# Altium PCB dongle.PcbDoc
Units mil, origin at the board's own origin, x right, y up, seen from the top; angles counter-clockwise.
Board outline 1358.54 x 591.71 mil, 2 copper layers (Top Layer, Bottom Layer); 24 components, 19 nets, 131 pads, 17 vias.
Unrouted connection lines stored in the file: 2.
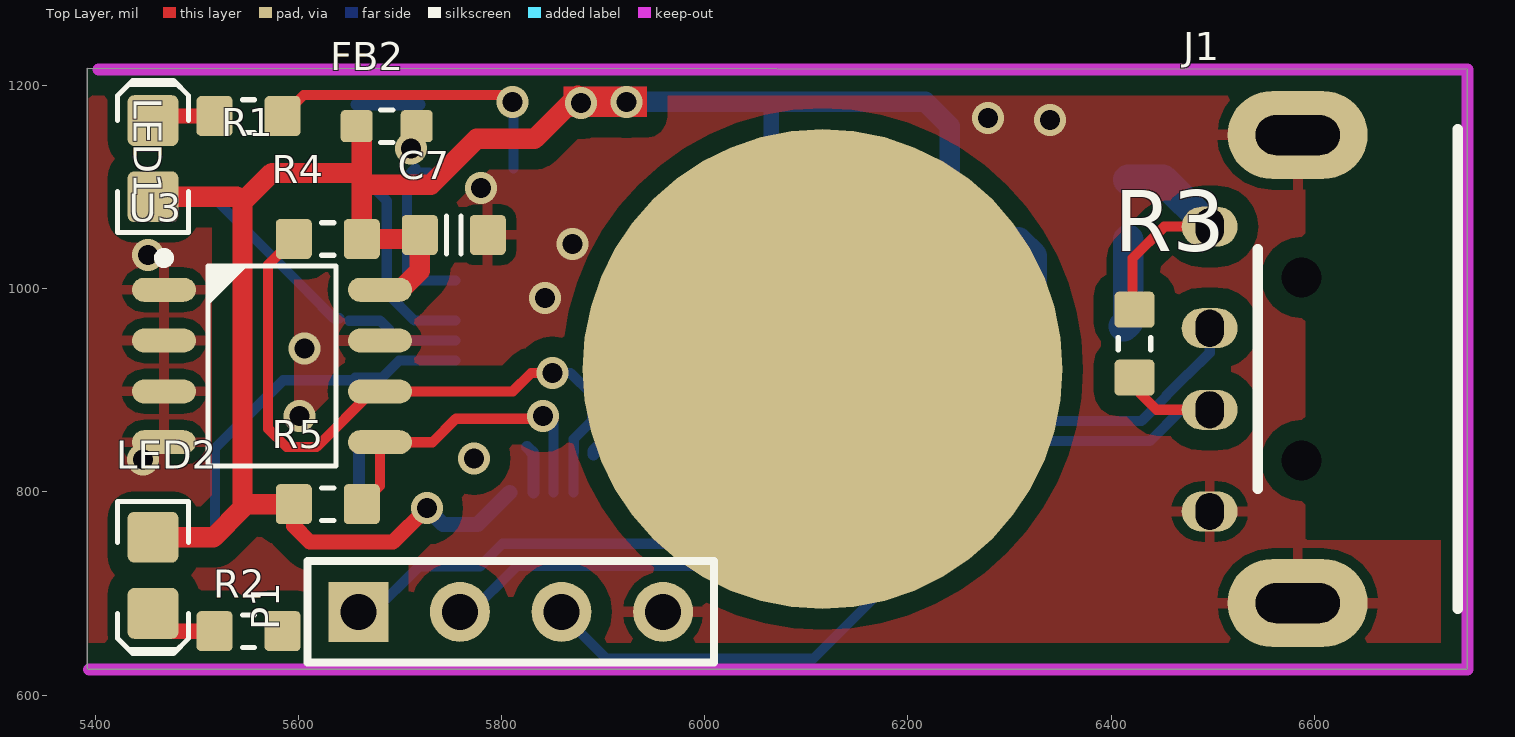
[diagram p0: Top Layer view]
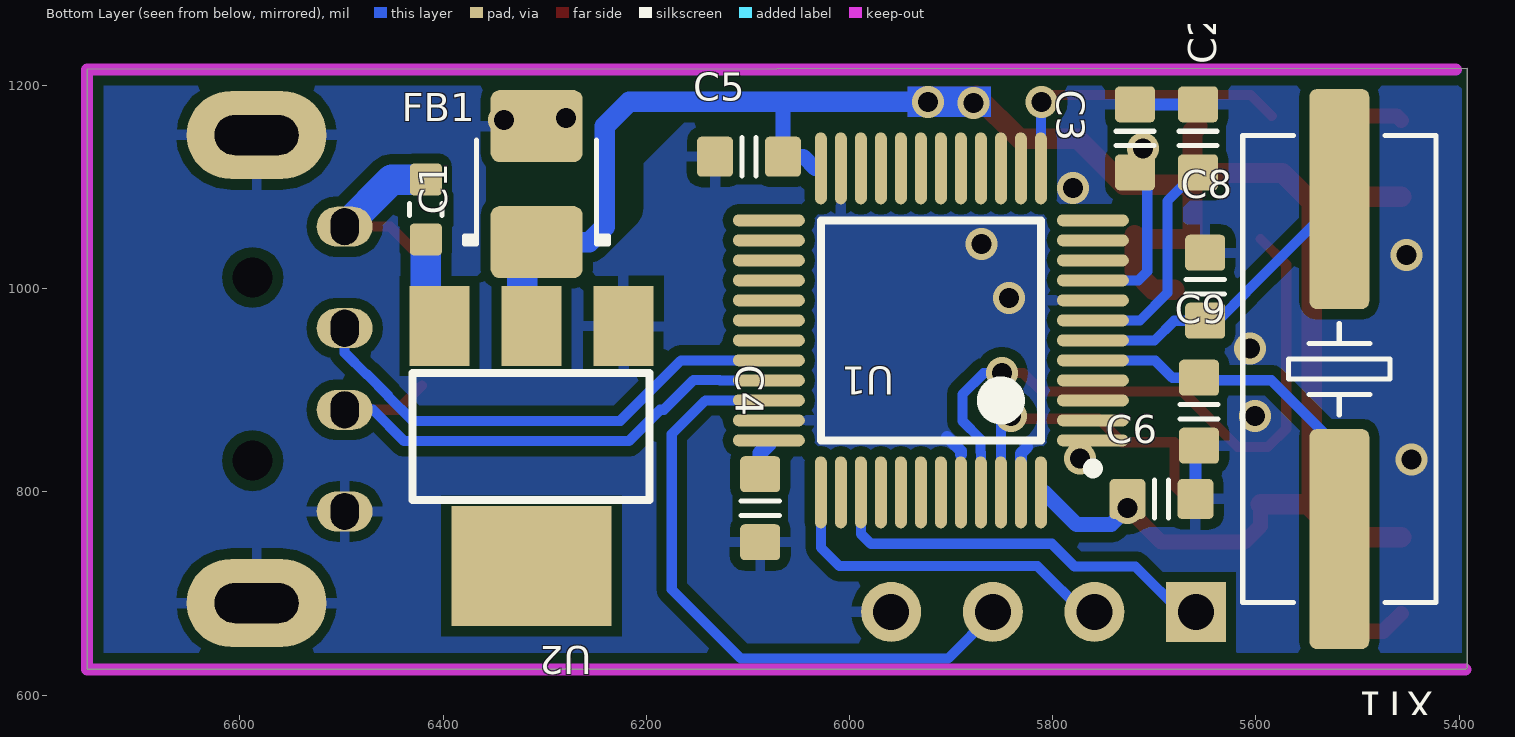
[diagram p1: Bottom Layer view, seen from below]

## Layer stack, top to bottom
Top Solder: solder mask 0.4, Solder Resist, Dk 3.5
Top Layer: signal copper 1.4
Dielectric 1: dielectric 12.6, FR-4, Dk 4.8
Bottom Layer: signal copper 1.4
Bottom Solder: solder mask 0.4, Solder Resist, Dk 3.5

## Board outline
6750.54,1216 6750.54,625.29 5393.7,625.29 5392,626.99 5392,1217

## Design rules (kind name [scope] priority, off if disabled: settings)
Clearance Clearance_2 [InNamedPolygon('roo')] p1: gap=20
Clearance Clearance_1 [InComponent('U1') vs InComponent('U1')] p2: gap=7
Clearance [All] p3: gap=10
DiffPairsRouting [All] p1: maxlimit=10 minlimit=10 mostfreqgap=10 toplayer_minwidth=10 toplayer_maxwidth=15 toplayer_prefwidth=10 bottomlayer_minwidth=10 bottomlayer_maxwidth=15 bottomlayer_prefwidth=10 maxuncoupledlength=500
PolygonConnect PolygonConnect_1 [All vs isVia] p1: connectstyle=Direct reliefconductorwidth=10 reliefentries=4 polygonreliefangle="90 Angle" airgapwidth=10
PolygonConnect [All] p2: connectstyle=Relief reliefconductorwidth=10 reliefentries=4 polygonreliefangle="90 Angle" airgapwidth=10
RoutingVias [All] p1: holewidth=28 width=50 viastyle="Through Hole" minholewidth=3.94 minwidth=3.94 maxholewidth=393.7 maxwidth=393.7
SolderMaskExpansion [All] p1: expansion=4
Width [All] p1: maxlimit=393.7 minlimit=10 preferedwidth=10 minimp=50.000000 maximp=50.000000 favimp=50.000000
28 further rules are at their usual default settings.

## Classes and differential pairs
differential pair USB: +USB_P -USB_N

## Components (designator, comment, footprint, x,y, rotation, side; value= is the part's Value field where it differs from the comment)
C1 "2.2u Tan" CAPMP3528X210N 6308,1103 r90 bottom
C2 "approved sub OK" CAPC1608X90N 5657,1148 r90 bottom
C3 "approved sub OK" CAPC1608X90N 5719,1148 r90 bottom
C4 "approved sub OK" CAPC1608X90N 6088,784 r270 bottom
C5 "approved sub OK" CAPC1608X90N 6099,1130 r0 bottom
C6 "approved sub OK" CAPC1608X90N 5693,793 r180 bottom
C7 "approved sub OK" CAPC1608X90N 5753,1053 r0 top
C8 "22p" CAPC1608X90N 5650,1002 r270 bottom
C9 "22p" CAPC1608X90N 5656,879 r90 bottom
FB1 "2K2 @ 100 MHz" FBC1608X95N 6417,1078 r270 bottom
FB2 "2K2 @ 100 MHz" FBC1608X95N 5687,1160 r0 top
J1 "USB" USB_A_PLUG 6497,921 r0 top
LED1 "Green" LED-0805-K 5457,1128 r90 top
LED2 "Green" LED-0805-K 5457,718 r270 top
P1 "Header 4" HDR1X4 5659,682 r0 top
R1 "Thick Film" RESC1608X55N 5551,1170 r0 top
R2 "Thick Film" RESC1608X55N 5551,663 r0 top
R3 "Thick Film" RESC1608X55N 6423,946 r270 top
R4 "10K" RESC1608X55N 5629,1049 r0 top
R5 "10K" RESC1608X55N 5629,788 r180 top
U1 "STM32F103CBT6" STM-LQFP48_N 5920,959 r0 bottom
U2 "AMS1117" "AMS1117 3.3" 6313,727 r0 bottom
U3 "at24c512" SOIC127P600X175-8AN 5574,924 r0 top
XT1 "12MHz" CRYSTAL_HC49-US-SM 5518,921 r270 bottom

## Footprints (in the part's own frame and the unit in brackets; to place one, negate y for a bottom-side part, rotate by r counter-clockwise, add the part's x,y. Pads: shape width x height; smd on the part's side, far side on the other; paste and mask are expansions set on the pad)
"AMS1117 3.3" [mm]
  rect 1.5x2 smd: 1(-2.3,-6) 2(0,-6) 3(2.3,-6)
  rect 4x3 smd: 2(0,0)
  silkscreen extent -2.95,-4.82 2.98,-1.65, body extent -3.28,-6.68 3.22,0.32, height 1.85
CAPC1608X90N [mm] "Chip Capacitor, Body 1.6x0.8mm, EIA 0603, IPC Medium Density"
  round 0.254 on Mech15: 0(0,0)
  rrect25% 0.9x1 smd: 1(-0.85,0) 2(0.85,0)
  Top Layer pour cut-out: -0.6,0.5 -0.4,0.7 0.4,0.7 0.6,0.5 0.6,-0.5 0.4,-0.7 -0.4,-0.7 -0.6,-0.5
  silkscreen extent -0.18,-0.48 0.18,0.48, body extent -0.85,-0.45 0.85,0.45, height 0.89
CAPMP3528X210N [mm] "Molded body capacitor, Body 3.5x2.8mm, 1210, IPC Nominal settings"
  round 0.254 on Mech15: 0(0,0)
  rrect25% 1.8x2.3 smd: 1(-1.45,0) 2(1.45,0)
  Top Layer pour cut-out: -0.508,1.27 0.508,1.27 0.508,-1.27 -0.508,-1.27
  silkscreen extent -1.5,-1.8 1.1,1.8, body extent -1.75,-1.4 1.75,1.4, height 2.1
CRYSTAL_HC49-US-SM [mm] "SMD Crystal HC49/US-SM package"
  round 0.508 on Mech15: 0(0,0)
  rrect25% 5.5x1.5 smd: 1(-4.25,0) 2(4.25,0)
  silkscreen extent -5.84,-2.41 5.84,2.41, body extent -6.4,-2.41 6.4,2.42, height 4.29
FBC1608X95N [mm] "Chip Ferrite, Body 1.6x0.8mm, 0603, IPC Medium Density"
  round 0.254 on Mech15: 0(0,0)
  rrect25% 0.8x0.8 smd: 1(-0.75,0) 2(0.75,0)
  Top Layer pour cut-out: -0.6,0.5 -0.4,0.7 0.4,0.7 0.6,0.5 0.6,-0.5 0.4,-0.7 -0.4,-0.7 -0.6,-0.5
  silkscreen extent -0.15,-0.41 0.15,0.41, body extent -0.87,-0.47 0.88,0.48, height 0.95
HDR1X4 [mm] "Connector; Header; 4 Position"
  rect 1.5x1.5 hole 0.9: 1(0,0)
  round 1.5 hole 0.9: 2(2.54,0) 3(5.08,0) 4(7.62,0)
  silkscreen extent -1.27,-1.27 8.89,1.27
LED-0805-K [mil]
  round 20 on Mech15: 0(0,0)
  rrect25% 50x50 smd: A(-37.5,0) K(37.5,0)
  Top Layer pour cut-out: -15,30 15,30 15,-30 -15,-30
  silkscreen extent -72,-35 77,35, body extent -39,-25 39,25, height 31
RESC1608X55N [mm] "Chip Resistor, Body 1.6x0.8mm, EIA 0603, IPC Medium Density"
  round 0.254 on Mech15: 0(0,0)
  rrect25% 0.9x1 smd: 1(-0.85,0) 2(0.85,0)
  Top Layer pour cut-out: -0.6,0.5 -0.4,0.7 0.4,0.7 0.6,0.5 0.6,-0.5 0.4,-0.7 -0.4,-0.7 -0.6,-0.5
  silkscreen extent -0.15,-0.41 0.15,0.41, body extent -0.87,-0.47 0.88,0.48, height 0.54
SOIC127P600X175-8AN [mm] "SOIC, 8-Leads, Body 4.9x3.9mm, Pitch 1.27mm, IPC Medium Density"
  round 1 on Mech15: 0(0,0)
  oval 1.6x0.6 smd: 1(-2.7,1.905) 2(-2.7,0.635) 3(-2.7,-0.635) 4(-2.7,-1.905) 5(2.7,-1.905) 6(2.7,-0.635) 7(2.7,0.635) 8(2.7,1.905)
  silkscreen extent -2.82,-2.5 1.6,2.82, body extent -3,-2.45 3,2.45, height 1.75
STM-LQFP48_N [mm] "QFP, 48-Leads, Body 7x7mm, Pitch 0.5mm, IPC Medium Density"
  oval 1.8x0.3 smd: 1(-4.05,2.75) 2(-4.05,2.25) 3(-4.05,1.75) 4(-4.05,1.25) 5(-4.05,0.75) 6(-4.05,0.25) 7(-4.05,-0.25) 8(-4.05,-0.75) 9(-4.05,-1.25) 10(-4.05,-1.75) 11(-4.05,-2.25) 12(-4.05,-2.75) 25(4.05,-2.75) 26(4.05,-2.25) 27(4.05,-1.75) 28(4.05,-1.25) 29(4.05,-0.75) 30(4.05,-0.25) 31(4.05,0.25) 32(4.05,0.75) 33(4.05,1.25) 34(4.05,1.75) 35(4.05,2.25) 36(4.05,2.75)
  oval 0.3x1.8 smd: 13(-2.75,-4.05) 14(-2.25,-4.05) 15(-1.75,-4.05) 16(-1.25,-4.05) 17(-0.75,-4.05) 18(-0.25,-4.05) 19(0.25,-4.05) 20(0.75,-4.05) 21(1.25,-4.05) 22(1.75,-4.05) 23(2.25,-4.05) 24(2.75,-4.05) 37(2.75,4.05) 38(2.25,4.05) 39(1.75,4.05) 40(1.25,4.05) 41(0.75,4.05) 42(0.25,4.05) 43(-0.25,4.05) 44(-0.75,4.05) 45(-1.25,4.05) 46(-1.75,4.05) 47(-2.25,4.05) 48(-2.75,4.05)
  silkscreen extent -4.17,-2.75 2.75,3.57, body extent -3.5,-3.5 3.5,3.5, height 1.6
USB_A_PLUG [mm]
  round 0 hole 1: 0(2.3,-2.29) 0(2.3,2.29)
  oval 1.4x1 hole 0.7 slot 0.92 at 90 deg: 1(0,3.56) 2(0,1.02) 3(0,-1.02) 4(0,-3.56)
  oval 3.5x2.2 hole 1 slot 2.1 at 0 deg: 5(2.2,5.85) 6(2.2,-5.85)
  silkscreen extent 1.2,-6 6.2,6

## Part data
C1: library part CAPT_47u_1210_6V3, "Capacitor SMD Tantalum 47uF 20% 6.3V 1210"
C2 C3 C4 C5 C6 C7: library part CAPC_1n_0603_X7R_100V_10%, "Capacitor SMD Cer 1nF 10% 100V X7R 0603"
C8 C9: library part CAPC_18p_0603_100V, "Capacitor SMD Cer 18pF 2% 100V NP0 0603"
FB1 FB2: library part FERRITE_2K2-100MHz_0603, "Ferrite bead 2.2K Ohm at 100 MHz 200mA 0603 SMD"
LED1 LED2: library part LED_SMD_Green_0805_6mcd, "LED, 0805 SMD, Green"
P1: "Header, 4-Pin"
R1 R2 R3: library part RES_1K5_0603_5%, "Resistor SMD chip 1.5k Ohm 0.1W 5% 0603"
R4 R5: library part RES_2K2_0603_5%, "Resistor 0603"
U1: "ARM Cortex-M3 32-bit MCU, 128 KB Flash, 20 KB Internal RAM, 37 I/Os, 48-pin LQFP, -40 to 85 degC, Tray"
U3: library part AT24C01BN-SP25-B
XT1: library part Crystal_6MHz_HC49/US, "Resonator Ceramic 6.00 MHz 30ppm"

## Free pads (board coordinates)
  round 472.44 smd: 1(6116,921)

## Via types
v1: diameter 31.5, hole 19.68, Top Layer to Bottom Layer, 17 vias

## Nets (pads, with @x,y where several pads share a name; then routed paths per layer and width w, separated by ;. In a path a pad name is that pad's centre, name@x,y a point inside that pad or via, vN(x,y) a via of type N, cw(c..) or ccw(c..) an arc to the next point about the centre after c; other vN are vias at no path point)
3.3V: C1.1 C4.1 C5.1 C6.1 C7.1 FB2.1 LED1.A LED2.A R4.2 R5.2 U1.24 U1.36 U1.48 U2.2 U3.8 | length 2160.8
  Top Layer w15: R5.2 5595.54,766.46 5611.19,750.81 5693.28,750.81 v1(5726.46,784)
  Top Layer w20: LED2.A 5516.5,755.5 5545,784 ; LED1.A 5539.5,1090.5 5545,1085 ; R5.2 5549,788 5545,784 ; FB2.1 5662.46,1155.01 5662.46,1109.01 5657.47,1114 5574,1114 5545,1085 ; U3.8 5701,999 5719.54,1017.54 C7.1 5715.54,1049 R4.2 5662.46,1102.25 5730.25,1102.25 5775.5,1147.5 5832.5,1147.5 v1@5875.09,1190.09 ; 5545,784 5545,1085
  Bottom Layer w15: v1(5726.46,784) 5742.46,768 5776.46,768 U1.48@5808.01,799.55 ; U1.24@6031.99,1118.45 6033.98,1118.45 6045.54,1130 C5.1 6065.54,1180.46 6062,1184 ; U1.36@6079.45,847.01 6088,838.46 C4.1
  Bottom Layer w20: v1(5923,1184) 6062,1184 6217,1184 6241,1160 6241,1061 6256.09,1045.91 C1.1
  Bottom Layer w30: C1.1 6322,1031.91 U2.2@6322,963.22
  other v1: 5878,1183
5V: FB1.1 J1.1 R3.1 | length 246.6
  Top Layer w10: R3.1@6421,971.46 6421,1030 6452.16,1061.16 J1.1
  Bottom Layer w30: FB1.1 6450.63,1107.53 J1.1
GND: C1.2 C2.2 C3.2 C4.2 C5.2 C6.2 C7.2 C8.1 C9.1 J1.4 J1.5 J1.6 P1.4 U1.8 U1.23 U1.35 U1.44 U1.47 U2.1 U3.1 U3.2 U3.3 U3.4 U3.7 | length 186
  Bottom Layer w11.81: C9.1 5659.54,842 C6.2 ; C2.2 C3.2 ; 5825.21,844.06 5831.42,837.86 U1.47 ; 5890.47,836.73 5890.47,840.47 5904,854
  other v1: 5447,832 5601,875 5606,941 5843,991 5452,1033 5870,1044 5780,1099 6340,1166 6279,1168
LED1: R1.2 U1.13 | length 303.8
  Top Layer w10: R1.2 5605.21,1190.75 5804.25,1190.75 v1(5811,1184)
  Bottom Layer w10: v1(5811,1184) 5811,1173 5811.73,1172.27 U1.13
LED2: R2.2
NetC3_1: C3.1 FB2.2 U1.9 | length 165.6
  Bottom Layer w10: C3.1@5715,1118.54 5707,1110.54 5707,1017 5715.79,1008.21 U1.9@5754.55,1008.21 ; C3.1 C3.1@5728.54,1114.54
  other v1: 5711,1138
NetFB1_2: FB1.2 U2.3 | length 87.1
  Bottom Layer w30: U2.3@6412.55,963.22 6417,967.67 FB1.2
NetLED1_K: LED1.K R1.1 | length 62.4
  Top Layer w15: LED1.K 5461.5,1170 R1.1
NetLED2_K: LED2.K R2.1 | length 67.8
  Top Layer w15: LED2.K 5474.5,663 R2.1
OSC_IN: C9.2 U1.5 XT1.2 | length 361.6
  Bottom Layer w10: XT1.2 5518,843 5585,910 5653.54,910 C9.2 5682.31,912.46 5699,929.16 ; 5699,929.47 U1.5@5754.55,929.47
OSC_OUT: C8.2 U1.6 XT1.1 | length 283.8
  Bottom Layer w10: XT1.1 5610,996.32 5610,996 5635,971 C8.2@5640.46,971 ; C8.2 5680.46,968.54 5699.84,949.16 U1.6@5754.55,949.16
SCL: R4.1 U1.45 U3.6 | length 666.2
  Top Layer w10: R4.1 5570.25,1023.72 5570.25,862.26 5588.26,844.25 5617.95,844.25 5672.7,899 U3.6 5811,899 5829,917 v1(5850,917)
  Bottom Layer w10: v1(5850,917) 5868,917 5889,896 5889,870 5871.1,852.1 5871.1,839.27 5870.79,838.96 U1.45
SDA: R5.1 U1.46 U3.5 | length 321.1
  Top Layer w10: R5.1 5680.3,805.83 U3.5 5732,849 5755,872 v1@5851,872
  Bottom Layer w10: v1@5851,872 5851.1,871.9 U1.46
  other v1: 5841,875
STMRST: C2.1 U1.7 | length 211.8
  Bottom Layer w10: C2.1@5657,1116.54 5687,1086.54 5687,996 5714.16,968.84 U1.7@5754.55,968.84
SWCLK: P1.2 U1.37 | length 350.6
  Bottom Layer w10: P1.2@5759,680 5768,680 5815,727 6010,727 6028.27,745.27 U1.37
SWIO: P1.3 U1.34 | length 630.7
  Bottom Layer w10: P1.3@5859,680 5903,636 6107,636 6175,704 6175,857 6141.9,890.1 U1.34@6073.45,890.1
SWO: P1.1 U1.39 | length 403.2
  Bottom Layer w10: P1.1@5659,680 5672,680 5718.53,726.53 5778.53,726.53 5801,749 5979,749 5988.9,758.9 U1.39
USB_N: J1.2 U1.32 | length 494.5
  Bottom Layer w10: U1.32 6166.09,929.47 6225.56,870 6430,870 6454.44,894.44 6454.44,895.21 6474.76,915.53 6475.53,915.53 6497,937 J1.2
USB_P: J1.3 R3.2 U1.33 | length 541.2
  Top Layer w10: R3.2@6421,904.54 6444.69,880.84 J1.3
  Bottom Layer w10: U1.33 6127.69,909.79 6128,910.1 6153.72,910.1 6182.98,880.84 6186.43,880.84 6217.27,850 6438.28,850 6469.13,880.84 J1.3
pads on no net: C1.0 C2.0 C3.0 C4.0 C5.0 C6.0 C7.0 C8.0 C9.0 FB1.0 FB2.0 J1.0 LED1.0 LED2.0 R1.0 R2.0 R3.0 R4.0 R5.0 U1.1 U1.2 U1.3 U1.4 U1.10 U1.11 U1.12 U1.14 U1.15 U1.16 U1.17 U1.18 U1.19 U1.20 U1.21 U1.22 U1.25 U1.26 U1.27 U1.28 U1.29 U1.30 U1.31 U1.38 U1.40 U1.41 U1.42 U1.43 U3.0 XT1.0
copper on no net:
  other v1: 5773,833

## Polygon pours and split planes (outlines as drawn)
GND on Bottom Layer "zir" (solid, pour order 4): 6750.54,1216 6750.54,621 5393,621 5397.63,626.41 5397.63,1216
GND on Top Layer "roo" (solid, pour order 6): 6593.36,752.46 6749.47,752.46 6750.54,753.71 6750.05,753.14 6750.05,625.29 5393.7,625.29 5393.7,1216 6579.65,1216 6582.59,1212.58 6591.21,1202.58 6591.21,753.71

## Keep-outs
Keep-Out Layer:
  lines w11.81: 5393.7,625.29 6750.54,625.29 6750.54,1216 5403.16,1216

## Other copper
Top Layer:
  rectangle net 3.3V: 5861,1169 5943,1199
Bottom Layer:
  rectangle net 3.3V: 5861,1169 5943,1199